# Altium PCB DataMergeBoard.PcbDoc (part 1 of 2)
Units mil, origin at the board's own origin, x right, y up, seen from the top; angles counter-clockwise.
Board outline 5250 x 1030 mil, 4 copper layers (Top Layer, Internal Plane 1, Internal Plane 2, Bottom Layer), stack 30.634 mil thick; 115 components, 100 nets, 456 pads, 199 vias.
Unrouted connection lines stored in the file: 1.
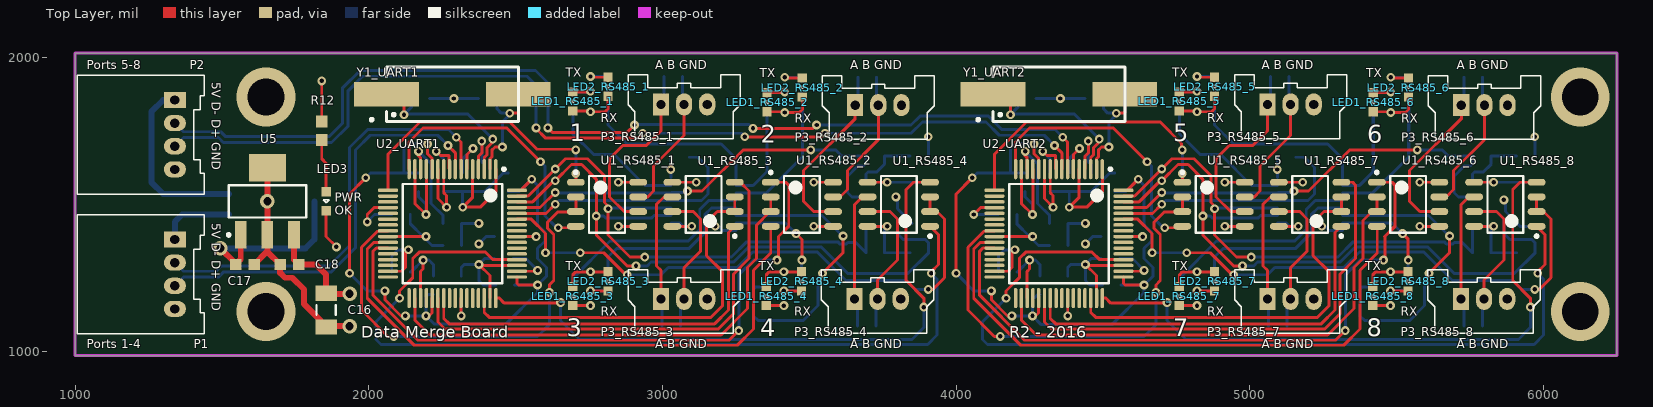
[diagram p0: Top Layer view]
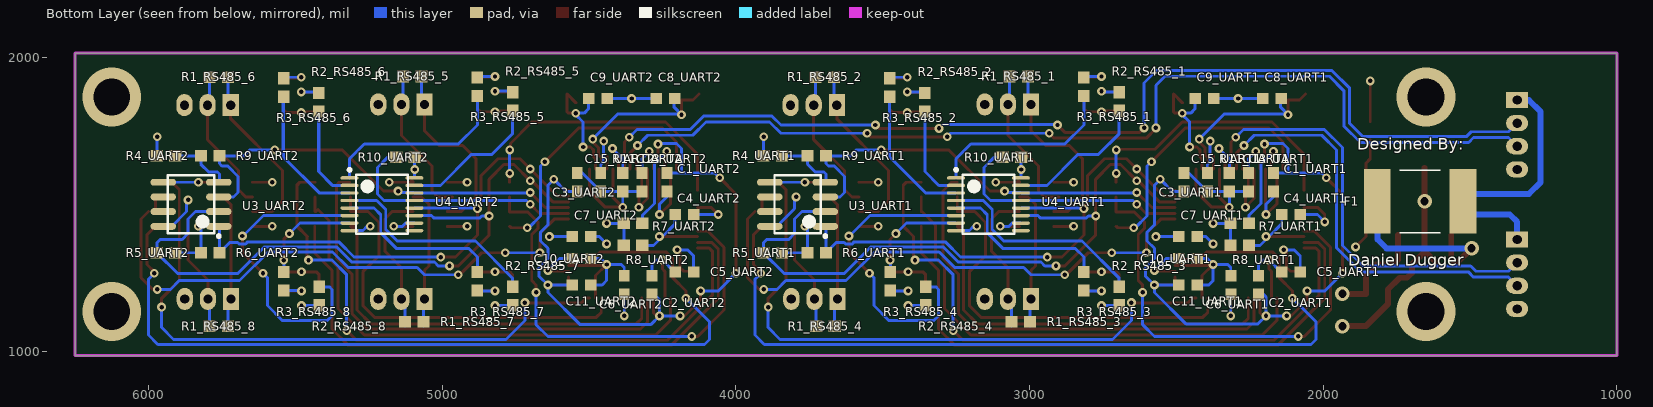
[diagram p1: Bottom Layer view, seen from below]
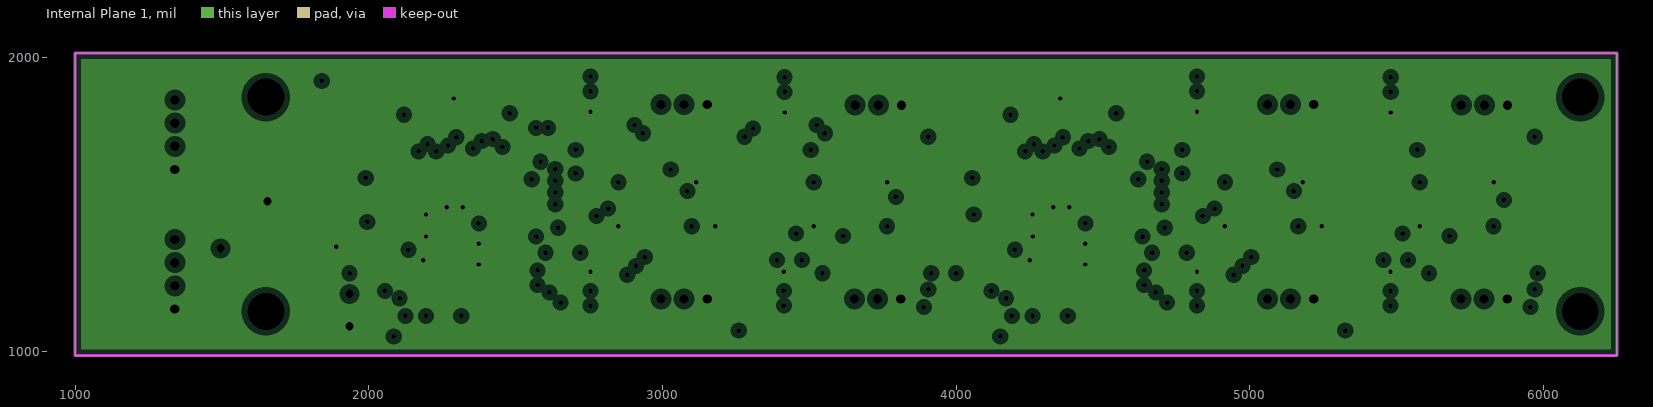
[diagram p2: Internal Plane 1, clearances drawn from the general rule]
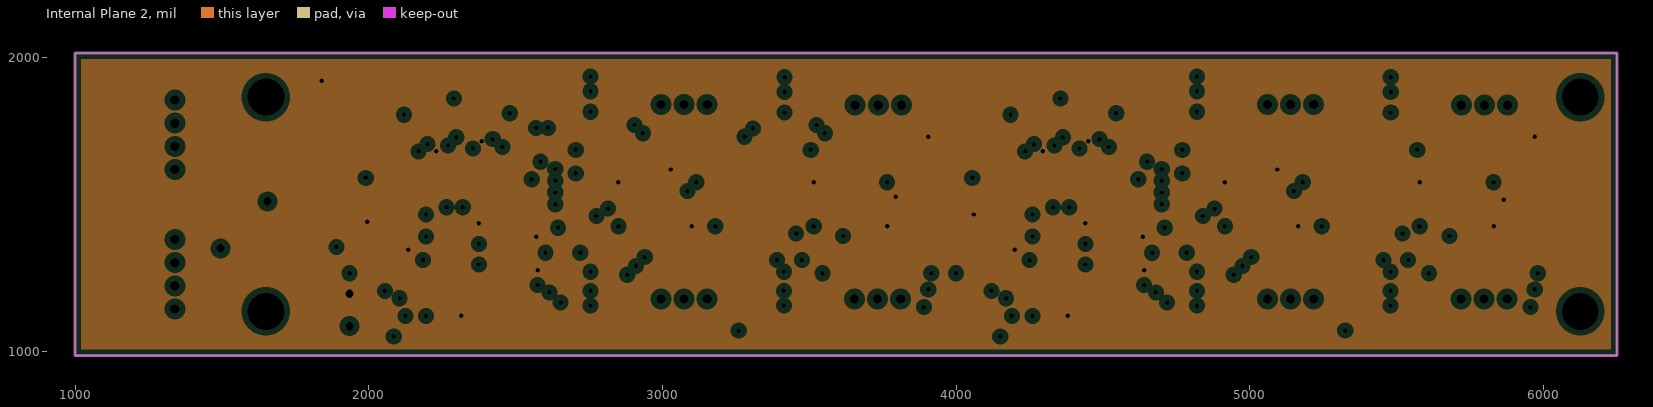
[diagram p3: Internal Plane 2, clearances drawn from the general rule]

## Layer stack, top to bottom
Top Solder: solder mask 0.4, Solder Resist, Dk 3.5
Top Layer: signal copper 1.4
Dielectric 1: core 10, FR-4, Dk 4.2
Internal Plane 1: plane copper 1.417, net GND
Dielectric 3: prepreg 5, Dk 4.2
Internal Plane 2: plane copper 1.417, net +3.3V
Dielectric 2: core 10, Dk 4.2
Bottom Layer: signal copper 1.4
Bottom Solder: solder mask 0.4, Solder Resist, Dk 3.5

## Board outline
1000,985 6250,985 6250,2015 1000,2015

## Design rules (kind name [scope] priority, off if disabled: settings)
Clearance [All] p1: gap=7
DiffPairsRouting [All] p1: maxlimit=10 minlimit=10 mostfreqgap=10 toplayer_minwidth=10 toplayer_maxwidth=20 toplayer_prefwidth=10 bottomlayer_minwidth=10 bottomlayer_maxwidth=20 bottomlayer_prefwidth=10 maxuncoupledlength=500
MatchedLengths [InDifferentialPairClass('All Differential Pairs')] p1: tolerance=150 checknetsindiffpair=TRUE checkdiffpairvsdiffpair=FALSE checkxsignals=FALSE checkothers=FALSE
MinimumSolderMaskSliver [All] p1 off: minsoldermaskwidth=10
PlaneClearance [All] p1: clearance=20
PlaneConnect [All] p1: planeconnectstyle=Relief reliefexpansion=20 reliefentries=4 reliefconductorwidth=10 reliefairgap=10
PolygonConnect [All] p1: connectstyle=Relief reliefconductorwidth=10 reliefentries=4 polygonreliefangle="90 Angle" airgapwidth=10
RoomDefinition VREG [InComponentClass('VREG')] p1: confinementstyle=ConfineIn formatcopy=TRUE lockcomponents=FALSE outline 1465.16,1020 2015,1020 2015,1980 1465.16,1980
RoomDefinition UART2 [InComponentClass('UART2')] p2: confinementstyle=ConfineIn formatcopy=TRUE lockcomponents=FALSE outline 3970,1020 6030,1020 6030,1980 3970,1980
RoomDefinition UART1 [InComponentClass('UART1')] p3: confinementstyle=ConfineIn formatcopy=TRUE lockcomponents=FALSE outline 1905,1020 3965,1020 3965,1980 1905,1980
RoomDefinition RS485_8 [InComponentClass('RS485_8')] p4: confinementstyle=ConfineIn formatcopy=TRUE lockcomponents=FALSE outline 5368.7,1022.48 6028.7,1022.48 6028.7,1632.48 5368.7,1632.48
RoomDefinition RS485_7 [InComponentClass('RS485_7')] p5: confinementstyle=ConfineIn formatcopy=TRUE lockcomponents=FALSE outline 4710,1022.48 5370,1022.48 5370,1632.48 4710,1632.48
RoomDefinition RS485_6 [InComponentClass('RS485_6')] p6: confinementstyle=ConfineIn formatcopy=TRUE lockcomponents=FALSE outline 5369.88,1367.52 6029.88,1367.52 6029.88,1977.52 5369.88,1977.52
RoomDefinition RS485_5 [InComponentClass('RS485_5')] p7: confinementstyle=ConfineIn formatcopy=TRUE lockcomponents=FALSE outline 4710,1370 5370,1370 5370,1980 4710,1980
RoomDefinition RS485_4 [InComponentClass('RS485_4')] p8: confinementstyle=ConfineIn formatcopy=TRUE lockcomponents=FALSE outline 3303.7,1022.48 3963.7,1022.48 3963.7,1632.48 3303.7,1632.48
RoomDefinition RS485_3 [InComponentClass('RS485_3')] p9: confinementstyle=ConfineIn formatcopy=TRUE lockcomponents=FALSE outline 2645,1022.48 3305,1022.48 3305,1632.48 2645,1632.48
RoomDefinition RS485_2 [InComponentClass('RS485_2')] p10: confinementstyle=ConfineIn formatcopy=TRUE lockcomponents=FALSE outline 3306.18,1367.52 3966.18,1367.52 3966.18,1977.52 3306.18,1977.52
RoomDefinition RS485_1 [InComponentClass('RS485_1')] p11: confinementstyle=ConfineIn formatcopy=TRUE lockcomponents=FALSE outline 2645,1370 3305,1370 3305,1980 2645,1980
RoutingVias [All] p1: holewidth=15 width=30 viastyle="Through Hole" minholewidth=15 minwidth=30 maxholewidth=28 maxwidth=50
SilkToSolderMaskClearance [IsPad] p1 off: minsilkscreentomaskgap=10 clearancetoexposedcopper=TRUE
SolderMaskExpansion SolderMaskExpansion_1 [IsVia And (Not IsTestpoint)] p1: expansion=-250
SolderMaskExpansion [All] p2: expansion=4
Width [All] p1: maxlimit=20 minlimit=10 preferedwidth=10 minimp=50.000000 maximp=50.000000 favimp=50.000000
25 further rules are at their usual default settings.

## Classes and differential pairs
component class DataMergeBoardTop: P1 P2
component class RS485_1: LED1_RS485_1 LED2_RS485_1 P3_RS485_1 R1_RS485_1 R2_RS485_1 R3_RS485_1 TX U1_RS485_1
component class RS485_2: LED1_RS485_2 LED2_RS485_2 P3_RS485_2 R1_RS485_2 R2_RS485_2 R3_RS485_2 U1_RS485_2
component class RS485_3: LED1_RS485_3 LED2_RS485_3 P3_RS485_3 R1_RS485_3 R2_RS485_3 R3_RS485_3 U1_RS485_3
component class RS485_4: LED1_RS485_4 LED2_RS485_4 P3_RS485_4 R1_RS485_4 R2_RS485_4 R3_RS485_4 U1_RS485_4
component class RS485_5: LED1_RS485_5 LED2_RS485_5 P3_RS485_5 R1_RS485_5 R2_RS485_5 R3_RS485_5 U1_RS485_5
component class RS485_6: LED1_RS485_6 LED2_RS485_6 P3_RS485_6 R1_RS485_6 R2_RS485_6 R3_RS485_6 U1_RS485_6
component class RS485_7: LED1_RS485_7 LED2_RS485_7 P3_RS485_7 R1_RS485_7 R2_RS485_7 R3_RS485_7 U1_RS485_7
component class RS485_8: LED1_RS485_8 LED2_RS485_8 P3_RS485_8 R1_RS485_8 R2_RS485_8 R3_RS485_8 U1_RS485_8
component class UART1: C1_UART1 C2_UART1 C3_UART1 C4_UART1 C5_UART1 C6_UART1 C7_UART1 C8_UART1 C9_UART1 C10_UART1 C11_UART1 C13_UART1 C15_UART1 R4_UART1 R5_UART1 R6_UART1 R7_UART1 R8_UART1 R9_UART1 R10_UART1 R11_UART1 U2_UART1 U3_UART1 U4_UART1 Y1_UART1
component class UART2: C1_UART2 C2_UART2 C3_UART2 C4_UART2 C5_UART2 C6_UART2 C7_UART2 C8_UART2 C9_UART2 C10_UART2 C11_UART2 C13_UART2 C15_UART2 R4_UART2 R5_UART2 R6_UART2 R7_UART2 R8_UART2 R9_UART2 R10_UART2 R11_UART2 U2_UART2 U3_UART2 U4_UART2 Y1_UART2
component class VREG: C16 C17 C18 F1 LED3 R12 U5
channel class UARTtoRS485: RS485_1 RS485_2 RS485_3 RS485_4 RS485_5 RS485_6 RS485_7 RS485_8
channel class USBtoUART: UART1 UART2
differential pair USB_2: +USB_2_P -USB_2_N
differential pair USB_1: +USB_1_P -USB_1_N

## Components (designator, comment, footprint, x,y, rotation, side; value= is the part's Value field where it differs from the comment)
C1_UART1 "Cap" CAPC0603 2170,1575 r90 bottom (schematic designator C1)
C1_UART2 "Cap" CAPC0603 4235,1575 r90 bottom (schematic designator C1)
C2_UART1 "Cap" CAPC0603 2220,1225 r270 bottom (schematic designator C2)
C2_UART2 "Cap" CAPC0603 4285,1225 r270 bottom (schematic designator C2)
C3_UART1 "Cap" CAPC0603 2475,1575 r270 bottom (schematic designator C3)
C3_UART2 "Cap" CAPC0603 4540,1575 r270 bottom (schematic designator C3)
C4_UART1 "Cap" CAPC0603 2110,1465 r180 bottom (schematic designator C4)
C4_UART2 "Cap" CAPC0603 4175,1465 r180 bottom (schematic designator C4)
C5_UART1 "Cap" CAPC0603 2110,1270 r180 bottom (schematic designator C5)
C5_UART2 "Cap" CAPC0603 4175,1270 r180 bottom (schematic designator C5)
C6_UART1 "Cap" CAPC0603 2315,1225 r270 bottom (schematic designator C6)
C6_UART2 "Cap" CAPC0603 4380,1225 r270 bottom (schematic designator C6)
C7_UART1 "Cap" CAPC0603 2460,1390 r0 bottom (schematic designator C7)
C7_UART2 "Cap" CAPC0603 4525,1390 r0 bottom (schematic designator C7)
C8_UART1 "Cap" CAPC0603 2175,1860 r0 bottom (schematic designator C8)
C8_UART2 "Cap" CAPC0603 4240,1860 r0 bottom (schematic designator C8)
C9_UART1 "Cap" CAPC0603 2405,1860 r180 bottom (schematic designator C9)
C9_UART2 "Cap" CAPC0603 4470,1860 r180 bottom (schematic designator C9)
C10_UART1 "Cap" CAPC0603 2460,1315 r0 bottom (schematic designator C10)
C10_UART2 "Cap" CAPC0603 4525,1315 r0 bottom (schematic designator C10)
C11_UART1 "Cap" CAPC0603 2460,1225 r180 bottom (schematic designator C11)
C11_UART2 "Cap" CAPC0603 4525,1225 r180 bottom (schematic designator C11)
C13_UART1 "Cap" CAPC0603 2255,1575 r90 bottom (schematic designator C13)
C13_UART2 "Cap" CAPC0603 4320,1575 r90 bottom (schematic designator C13)
C15_UART1 "Cap" CAPC0603 2395,1575 r270 bottom (schematic designator C15)
C15_UART2 "Cap" CAPC0603 4460,1575 r270 bottom (schematic designator C15)
C16 "Cap" CAPC1206 1855,1140 r90 top
C17 "Cap" CAPC0603 1578.5,1295 r0 top
C18 "Cap" CAPC0603 1730,1295 r180 top
F1 "PTC Fuse" PTC7451X11N 1670,1510 r0 bottom
LED1_RS485_1 "LED" LED0603 2695,1850 r270 top (schematic designator LED1)
LED1_RS485_2 "LED" LED0603 3356.18,1847.52 r270 top (schematic designator LED1)
LED1_RS485_3 "LED" LED0603 2695,1187.48 r90 top (schematic designator LED1)
LED1_RS485_4 "LED" LED0603 3353.7,1187.48 r90 top (schematic designator LED1)
LED1_RS485_5 "LED" LED0603 4760,1850 r270 top (schematic designator LED1)
LED1_RS485_6 "LED" LED0603 5419.88,1847.52 r270 top (schematic designator LED1)
LED1_RS485_7 "LED" LED0603 4760,1187.48 r90 top (schematic designator LED1)
LED1_RS485_8 "LED" LED0603 5418.7,1187.48 r90 top (schematic designator LED1)
LED2_RS485_1 "LED" LED0603 2815,1900 r270 top (schematic designator LED2)
LED2_RS485_2 "LED" LED0603 3476.18,1897.52 r270 top (schematic designator LED2)
LED2_RS485_3 "LED" LED0603 2815,1237.48 r90 top (schematic designator LED2)
LED2_RS485_4 "LED" LED0603 3473.7,1237.48 r90 top (schematic designator LED2)
LED2_RS485_5 "LED" LED0603 4880,1900 r270 top (schematic designator LED2)
LED2_RS485_6 "LED" LED0603 5539.88,1897.52 r270 top (schematic designator LED2)
LED2_RS485_7 "LED" LED0603 4880,1237.48 r90 top (schematic designator LED2)
LED2_RS485_8 "LED" LED0603 5538.7,1237.48 r90 top (schematic designator LED2)
LED3 "LED" LED0603 1855,1510 r270 top
P1 "1X4 RA" MOLEX-HDR-1X4-SHERLOCK-RA 1340,1380 r90 top locked
P2 "1X4 RA" MOLEX-HDR-1X4-SHERLOCK-RA 1340,1855 r90 top locked
P3_RS485_1 "1X3 VERT" MOLEX-HDR-1X3-SHERLOCK-VERT 2995,1840 r180 top (schematic designator P3)
P3_RS485_2 "1X3 VERT" MOLEX-HDR-1X3-SHERLOCK-VERT 3656.18,1837.52 r180 top (schematic designator P3)
P3_RS485_3 "1X3 VERT" MOLEX-HDR-1X3-SHERLOCK-VERT 2995,1177.48 r180 top (schematic designator P3)
P3_RS485_4 "1X3 VERT" MOLEX-HDR-1X3-SHERLOCK-VERT 3653.7,1177.48 r180 top (schematic designator P3)
P3_RS485_5 "1X3 VERT" MOLEX-HDR-1X3-SHERLOCK-VERT 5060,1840 r180 top (schematic designator P3)
P3_RS485_6 "1X3 VERT" MOLEX-HDR-1X3-SHERLOCK-VERT 5719.88,1837.52 r180 top (schematic designator P3)
P3_RS485_7 "1X3 VERT" MOLEX-HDR-1X3-SHERLOCK-VERT 5060,1177.48 r180 top (schematic designator P3)
P3_RS485_8 "1X3 VERT" MOLEX-HDR-1X3-SHERLOCK-VERT 5718.7,1177.48 r180 top (schematic designator P3)
R1_RS485_1 "Res" RES0603 3036.3,1935 r180 bottom (schematic designator R1)
R1_RS485_2 "Res" RES0603 3697.48,1932.52 r180 bottom (schematic designator R1)
R1_RS485_3 "Res" RES0603 3030,1100 r180 bottom (schematic designator R1)
R1_RS485_4 "Res" RES0603 3695,1085 r180 bottom (schematic designator R1)
R1_RS485_5 "Res" RES0603 5101.3,1935 r180 bottom (schematic designator R1)
R1_RS485_6 "Res" RES0603 5761.18,1932.52 r180 bottom (schematic designator R1)
R1_RS485_7 "Res" RES0603 5095,1100 r180 bottom (schematic designator R1)
R1_RS485_8 "Res" RES0603 5760,1085 r180 bottom (schematic designator R1)
R2_RS485_1 "Res" RES0603 2695,1850 r90 bottom (schematic designator R2)
R2_RS485_2 "Res" RES0603 3356.18,1847.52 r90 bottom (schematic designator R2)
R2_RS485_3 "Res" RES0603 2695,1187.48 r270 bottom (schematic designator R2)
R2_RS485_4 "Res" RES0603 3353.7,1187.48 r270 bottom (schematic designator R2)
R2_RS485_5 "Res" RES0603 4760,1850 r90 bottom (schematic designator R2)
R2_RS485_6 "Res" RES0603 5419.88,1847.52 r90 bottom (schematic designator R2)
R2_RS485_7 "Res" RES0603 4760,1187.48 r270 bottom (schematic designator R2)
R2_RS485_8 "Res" RES0603 5418.7,1187.48 r270 bottom (schematic designator R2)
R3_RS485_1 "Res" RES0603 2815,1900 r90 bottom (schematic designator R3)
R3_RS485_2 "Res" RES0603 3476.18,1897.52 r90 bottom (schematic designator R3)
R3_RS485_3 "Res" RES0603 2815,1237.48 r270 bottom (schematic designator R3)
R3_RS485_4 "Res" RES0603 3473.7,1237.48 r270 bottom (schematic designator R3)
R3_RS485_5 "Res" RES0603 4880,1900 r90 bottom (schematic designator R3)
R3_RS485_6 "Res" RES0603 5539.88,1897.52 r90 bottom (schematic designator R3)
R3_RS485_7 "Res" RES0603 4880,1237.48 r270 bottom (schematic designator R3)
R3_RS485_8 "Res" RES0603 5538.7,1237.48 r270 bottom (schematic designator R3)
R4_UART1 "Res" RES0603 3875,1665 r180 bottom (schematic designator R4)
R4_UART2 "Res" RES0603 5940,1665 r180 bottom (schematic designator R4)
R5_UART1 "Res" RES0603 3875,1335 r0 bottom (schematic designator R5)
R5_UART2 "Res" RES0603 5940,1335 r0 bottom (schematic designator R5)
R6_UART1 "Res" RES0603 3725,1335 r180 bottom (schematic designator R6)
R6_UART2 "Res" RES0603 5790,1335 r180 bottom (schematic designator R6)
R7_UART1 "Res" RES0603 2285,1435 r180 bottom (schematic designator R7)
R7_UART2 "Res" RES0603 4350,1435 r180 bottom (schematic designator R7)
R8_UART1 "Res" RES0603 2285,1360 r180 bottom (schematic designator R8)
R8_UART2 "Res" RES0603 4350,1360 r180 bottom (schematic designator R8)
R9_UART1 "Res" RES0603 3725,1665 r180 bottom (schematic designator R9)
R9_UART2 "Res" RES0603 5790,1665 r180 bottom (schematic designator R9)
R10_UART1 "Res" RES0603 3060,1660 r0 bottom (schematic designator R10)
R10_UART2 "Res" RES0603 5125,1660 r0 bottom (schematic designator R10)
R11_UART1 "Res" RES0603 2320,1575 r270 bottom (schematic designator R11)
R11_UART2 "Res" RES0603 4385,1575 r270 bottom (schematic designator R11)
R12 "Res" RES0603 1840,1750 r270 top
U1_RS485_1 "MAX14840EASA+" MAX14840EASA+ 2811.3,1500 r0 top (schematic designator U1)
U1_RS485_2 "MAX14840EASA+" MAX14840EASA+ 3475,1500 r0 top (schematic designator U1)
U1_RS485_3 "MAX14840EASA+" MAX14840EASA+ 3140,1500 r180 top (schematic designator U1)
U1_RS485_4 "MAX14840EASA+" MAX14840EASA+ 3805,1500 r180 top (schematic designator U1)
U1_RS485_5 "MAX14840EASA+" MAX14840EASA+ 4876.3,1500 r0 top (schematic designator U1)
U1_RS485_6 "MAX14840EASA+" MAX14840EASA+ 5538.7,1500 r0 top (schematic designator U1)
U1_RS485_7 "MAX14840EASA+" MAX14840EASA+ 5205,1500 r180 top (schematic designator U1)
U1_RS485_8 "MAX14840EASA+" MAX14840EASA+ 5870,1500 r180 top (schematic designator U1)
U2_UART1 "FT4232H" FT4232HL 2285,1400 r270 top (schematic designator U2)
U2_UART2 "FT4232H" FT4232HL 4350,1400 r270 top (schematic designator U2)
U3_UART1 "93LC46B" SOIC-8pin 3790,1500 r0 bottom (schematic designator U3)
U3_UART2 "93LC46B" SOIC-8pin 5855,1500 r0 bottom (schematic designator U3)
U4_UART1 "SN74HC595" TSSOP-16pin 3140,1500 r180 bottom (schematic designator U4)
U4_UART2 "SN74HC595" TSSOP-16pin 5205,1500 r180 bottom (schematic designator U4)
U5 "3.3V LDO Reg" SOT23-4n 1655,1510 r90 top
Y1_UART1 "12MHz" HC49/US 2285,1875 r0 top (schematic designator Y1)
Y1_UART2 "12MHz" HC49/US 4350,1875 r0 top (schematic designator Y1)

## Footprints (in the part's own frame and the unit in brackets; to place one, negate y for a bottom-side part, rotate by r counter-clockwise, add the part's x,y. Pads: shape width x height; smd on the part's side, far side on the other; paste and mask are expansions set on the pad)
CAPC0603 [mm] "Chip Capacitor, 2-Leads, Body 1.60x0.80mm, IPC Medium Density"
  rect 1x0.95 smd: 1(-0.8,0) 2(0.8,0)
  body extent -0.88,-0.48 0.87,0.48, height 0.8
CAPC1206 [mm] "Chip Capacitor, 2-Leads, Body 3.20x1.60mm, IPC Medium Density"
  rect 1.3x1.85 smd: 1(-1.45,0) 2(1.45,0)
  silkscreen extent -0.4,-0.82 0.4,0.82, body extent -1.7,-0.9 1.7,0.9, height 1.8
FT4232HL [mm] "TSQFP, 64-Leads, Body 10.00x10.00mm, Pitch 0.50mm, IPC Medium Density"
  oval 1.75x0.3 smd: 1(-5.575,3.75) 2(-5.575,3.25) 3(-5.575,2.75) 4(-5.575,2.25) 5(-5.575,1.75) 6(-5.575,1.25) 7(-5.575,0.75) 8(-5.575,0.25) 9(-5.575,-0.25) 10(-5.575,-0.75) 11(-5.575,-1.25) 12(-5.575,-1.75) 13(-5.575,-2.25) 14(-5.575,-2.75) 15(-5.575,-3.25) 16(-5.575,-3.75) 33(5.575,-3.75) 34(5.575,-3.25) 35(5.575,-2.75) 36(5.575,-2.25) 37(5.575,-1.75) 38(5.575,-1.25) 39(5.575,-0.75) 40(5.575,-0.25) 41(5.575,0.25) 42(5.575,0.75) 43(5.575,1.25) 44(5.575,1.75) 45(5.575,2.25) 46(5.575,2.75) 47(5.575,3.25) 48(5.575,3.75)
  oval 0.3x1.75 smd: 17(-3.75,-5.575) 18(-3.25,-5.575) 19(-2.75,-5.575) 20(-2.25,-5.575) 21(-1.75,-5.575) 22(-1.25,-5.575) 23(-0.75,-5.575) 24(-0.25,-5.575) 25(0.25,-5.575) 26(0.75,-5.575) 27(1.25,-5.575) 28(1.75,-5.575) 29(2.25,-5.575) 30(2.75,-5.575) 31(3.25,-5.575) 32(3.75,-5.575) 49(3.75,5.575) 50(3.25,5.575) 51(2.75,5.575) 52(2.25,5.575) 53(1.75,5.575) 54(1.25,5.575) 55(0.75,5.575) 56(0.25,5.575) 57(-0.25,5.575) 58(-0.75,5.575) 59(-1.25,5.575) 60(-1.75,5.575) 61(-2.25,5.575) 62(-2.75,5.575) 63(-3.25,5.575) 64(-3.75,5.575)
  silkscreen extent -5.7,-4.3 4.3,4.58, body extent -5,-5 5,5, height 1.6
HC49/US [mm]
  rect 5.6x2.1 smd: 1(-5.7,0) 2(5.7,0)
  silkscreen extent -7.11,-2.35 5.7,2.35, body extent -6.35,-2.35 6.35,2.35, height 3.16
LED0603 [mm] "Chip LED, 2-Leads, Body 1.60x0.80mm, IPC Medium Density"
  rect 0.8x0.8 smd: A(-0.825,0) C(0.825,0)
  silkscreen extent -0.13,-0.25 0.13,0.25, body extent -0.88,-0.48 0.87,0.47, height 0.8
MAX14840EASA+ [mm] "SOIC, 8-Leads, Body 4.90x3.90mm, Pitch 1.27mm, IPC Medium Density"
  oval 1.55x0.6 smd: 1(-2.7,1.905) 2(-2.7,0.635) 3(-2.7,-0.635) 4(-2.7,-1.905) 5(2.7,-1.905) 6(2.7,-0.635) 7(2.7,0.635) 8(2.7,1.905)
  silkscreen extent -2.82,-2.45 1.55,2.88, body extent -1.95,-2.45 1.95,2.45, height 1.75
MOLEX-HDR-1X3-SHERLOCK-VERT [mm]
  rect 1.397x1.905 hole 0.8: 1(0,0)
  oval 1.397x1.905 hole 0.8: 2(-2,0) 3(-4,0)
  silkscreen extent -6.85,-2.55 2.85,2.95, body extent -6.88,-2.57 2.82,2.98, height 8.57
MOLEX-HDR-1X4-SHERLOCK-RA [mm]
  rect 1.397x1.905 hole 0.8: 1(0,0)
  oval 1.397x1.905 hole 0.8: 2(-2,0) 3(-4,0) 4(-6,0)
  silkscreen extent -8.15,-2.55 2.15,8.46, body extent -8.17,-1.98 2.13,8.52, height 5.54
PTC7451X11N [mm] "Chip PTC, 2920, 7351 metric 2-Leads, Body 7.36x5.12mm, IPC Medium Density"
  rect 2.3x5.6 smd: 1(-3.7,0) 2(3.7,0)
  silkscreen extent -1.75,-2.7 1.75,2.7, body extent -3.99,-2.72 3.99,2.72, height 1.15
RES0603 [mm] "Chip Resistor, 2-Leads, Body 1.60x0.80mm, IPC Medium Density"
  rect 1.05x1 smd: 1(-0.8,0) 2(0.8,0)
  body extent -0.88,-0.48 0.87,0.47, height 0.8
SOIC-8pin [mm] "For 296-1345-1-ND"
  oval 2.2x0.6 smd: 1(-2.4,1.905) 2(-2.4,0.635) 3(-2.4,-0.635) 4(-2.4,-1.905) 5(2.4,-1.905) 6(2.4,-0.635) 7(2.4,0.635) 8(2.4,1.905)
  silkscreen extent -2.52,-2.5 2,2.88, body extent -2,-2.5 2,2.5, height 1.75
SOT23-4n [mm] "SOT223, 4-Leads, Body 6.50x7.00mm (avg), Pitch 2.30mm, IPC Medium Density"
  rect 2.4x1 smd: 1(-2.9,2.3) 2(-2.9,0) 3(-2.9,-2.3)
  rect 2.4x3.2 smd: 4(2.9,0)
  silkscreen extent -3.02,-3.35 1.4,3.47, body extent -1.85,-3.35 1.85,3.35, height 1.7
TSSOP-16pin [mm] "For 296-19764-ND"
  oval 1.55x0.3 smd: 1(-2.8,2.275) 2(-2.8,1.625) 3(-2.8,0.975) 4(-2.8,0.325) 5(-2.8,-0.325) 6(-2.8,-0.975) 7(-2.8,-1.625) 8(-2.8,-2.275) 9(2.8,-2.275) 10(2.8,-1.625) 11(2.8,-0.975) 12(2.8,-0.325) 13(2.8,0.325) 14(2.8,0.975) 15(2.8,1.625) 16(2.8,2.275)
  silkscreen extent -2.93,-2.55 2.25,3.1, body extent -2.25,-2.55 2.25,2.55, height 1.2

## Part data
C1_UART1 C1_UART2 C2_UART1 C2_UART2 C3_UART1 C3_UART2 C4_UART1 C4_UART2 C5_UART1 C5_UART2 C6_UART1 C6_UART2 C7_UART1 C7_UART2 C10_UART1 C10_UART2 C13_UART1 C13_UART2 C15_UART1 C15_UART2 C17 C18: "CAP CER 0.1UF 50V X7R 0603"
C8_UART1 C8_UART2 C9_UART1 C9_UART2: "CAP CER 27PF 50V NP0 0603"
C11_UART1 C11_UART2: "CAP CER 3.3UF 16V X5R 0603"
C16: "CAP CER 47UF 10V X5R 1206"
F1: library part PTC_Fuse, "PTC RESTTBLE 33V 1.10A CHIP 2920"
LED1_RS485_1 LED1_RS485_2 LED1_RS485_3 LED1_RS485_4 LED1_RS485_5 LED1_RS485_6 LED1_RS485_7 LED1_RS485_8: "LED RED CLEAR 0603 SMD"
LED2_RS485_1 LED2_RS485_2 LED2_RS485_3 LED2_RS485_4 LED2_RS485_5 LED2_RS485_6 LED2_RS485_7 LED2_RS485_8: "LED GREEN CLEAR 0603 SMD"
LED3: "LED ORANGE CLEAR 0603 SMD"
P1 P2: library part MOLEX-HDR-1x4-SHERLOCK_RA, "CONN HEADER 4POS 2MM R/A TIN"
P3_RS485_1 P3_RS485_2 P3_RS485_3 P3_RS485_4 P3_RS485_5 P3_RS485_6 P3_RS485_7 P3_RS485_8: library part MOLEX-HDR-1x3-SHERLOCK_VERT, "CONN HEADER 3POS 2MM VERT TIN"
R1_RS485_1 R1_RS485_2 R1_RS485_3 R1_RS485_4 R1_RS485_5 R1_RS485_6 R1_RS485_7 R1_RS485_8: "RES SMD 120 OHM 1% 1/10W 0603"
R2_RS485_1 R2_RS485_2 R2_RS485_3 R2_RS485_4 R2_RS485_5 R2_RS485_6 R2_RS485_7 R2_RS485_8 R3_RS485_1 R3_RS485_2 R3_RS485_3 R3_RS485_4 R3_RS485_5 R3_RS485_6 R3_RS485_7 R3_RS485_8: "RES SMD 330 OHM 1% 1/10W 0603"
R4_UART1 R4_UART2 R5_UART1 R5_UART2 R6_UART1 R6_UART2 R10_UART1 R10_UART2: "RES SMD 10K OHM 1% 1/10W 0603"
R7_UART1 R7_UART2: "RES SMD 1K OHM 1% 1/10W 0603"
R8_UART1 R8_UART2: "RES SMD 100K OHM 1% 1/10W 0603"
R9_UART1 R9_UART2: "RES SMD 2.2K OHM 1% 1/10W 0603"
R11_UART1 R11_UART2: "RES SMD 12K OHM 1% 1/10W 0603"
R12: "RES SMD 470 OHM 1% 1/10W 0603"
U1_RS485_1 U1_RS485_2 U1_RS485_3 U1_RS485_4 U1_RS485_5 U1_RS485_6 U1_RS485_7 U1_RS485_8: "IC TXRX RS422/485 40MBPS 8SOIC"
U2_UART1 U2_UART2: "IC USB HS QUAD UART/SYNC 64-LQFP"
U3_UART1 U3_UART2: "IC EEPROM 1KBIT 2MHZ 8SOIC"
U4_UART1 U4_UART2: "IC 8BIT SHIFT REGISTER 16-TSSOP"
U5: library part LM3940IMPX-3.3, "IC REG LDO 3.3V 1A SOT223"
Y1_UART1 Y1_UART2: library part ABLS2-12.000MHZ-D4Y-T, "CRYSTAL 12.0000MHZ 18PF SMD"

## Via types
v1: diameter 30, hole 15, Top Layer to Bottom Layer, 191 vias
v2: diameter 50, hole 28, Top Layer to Bottom Layer, 4 vias
v3: diameter 200, hole 125, Top Layer to Bottom Layer, 4 vias

## Nets (pads, with @x,y where several pads share a name; then routed paths per layer and width w, separated by ;. In a path a pad name is that pad's centre, name@x,y a point inside that pad or via, vN(x,y) a via of type N, cw(c..) or ccw(c..) an arc to the next point about the centre after c; other vN are vias at no path point)
+1.8V: C1_UART1.2 C1_UART2.2 C2_UART1.2 C2_UART2.2 C3_UART1.2 C3_UART2.2 C11_UART1.1 C11_UART2.1 U2_UART1.12 U2_UART1.37 U2_UART1.49 U2_UART1.64 U2_UART2.12 U2_UART2.37 U2_UART2.49 U2_UART2.64 | length 5026.9
  Top Layer w10: v1(1935,1265) 1935,1535 v1(1990,1590) ; v1(2055,1205) 2055,1175 2110,1120 v1(2125,1120) ; v1(2195,1120) 2205,1120 2215,1130 2215,1179.41 U2_UART1.37@2216.1,1180.51 ; v1(2200,1705) 2200,1671.82 2216.1,1655.71 U2_UART1.12@2216.1,1619.49 ; U2_UART1.49@2504.49,1252.36 2504.49,1230.51 2510,1225 v1(2575,1225) ; U2_UART1.64@2504.49,1547.64 2517.64,1547.64 v1(2555,1585) ; v1(4000,1265) 4000,1535 v1(4055,1590) ; v1(4120,1205) 4120,1175 4175,1120 v1(4190,1120) ; v1(4260,1120) 4270,1120 4280,1130 4280,1179.41 U2_UART2.37@4281.1,1180.51 ; v1(4265,1705) 4265,1671.82 4281.1,1655.71 U2_UART2.12@4281.1,1619.49 ; U2_UART2.49@4569.49,1252.36 4569.49,1230.51 4575,1225 v1(4640,1225) ; U2_UART2.64@4569.49,1547.64 4582.64,1547.64 v1(4620,1585)
  Bottom Layer w10: v1(1935,1265) 1995,1205 v1(2055,1205) ; v1(1990,1590) 2006.5,1606.5 C1_UART1.2@2170,1606.5 ; 2120,1606.5 2120,1690 2137,1707 2198,1707 v1(2200,1705) ; v1(2125,1120) v1(2195,1120) ; C2_UART1.2@2220,1193.5 2203.5,1193.5 2195,1185 v1(2195,1120) ; C3_UART1.2@2475,1543.5 2513.5,1543.5 v1(2555,1585) 2575,1565 2575,1430 2600,1405 2600,1375 2575,1350 2575,1315 2605,1285 2605,1255 v1(2575,1225) ; C11_UART1.1@2496.5,1225 v1(2575,1225) ; v1(4000,1265) 4060,1205 v1(4120,1205) ; v1(4055,1590) 4071.5,1606.5 C1_UART2.2@4235,1606.5 ; 4185,1606.5 4185,1690 4202,1707 4263,1707 v1(4265,1705) ; v1(4190,1120) v1(4260,1120) ; C2_UART2.2@4285,1193.5 4278.5,1193.5 4260,1175 v1(4260,1120) ; C3_UART2.2@4540,1543.5 4578.5,1543.5 v1(4620,1585) 4640,1565 4640,1430 4665,1405 4665,1375 4640,1350 4640,1315 4670,1285 4670,1255 v1(4640,1225) ; C11_UART2.1@4561.5,1225 v1(4640,1225) ; v1(2195,1120) 2222,1093 2468,1093 2575,1200 v1(2575,1225) ; v1(4260,1120) 4290,1090 4530,1090 4640,1200 v1(4640,1225)
+3.3V: C4_UART1.2 C4_UART2.2 C5_UART1.2 C5_UART2.2 C6_UART1.2 C6_UART2.2 C7_UART1.2 C7_UART2.2 C10_UART1.2 C10_UART2.2 C13_UART1.2 C13_UART2.2 C15_UART1.1 C15_UART2.1 C16.2 C18.1 R4_UART1.1 R4_UART2.1 R5_UART1.1 R5_UART2.1 R6_UART1.1 R6_UART2.1 R7_UART1.1 R7_UART2.1 R8_UART1.1 R8_UART2.1 R10_UART1.1 R10_UART2.1 R12.1 U1_RS485_1.8 U1_RS485_2.8 U1_RS485_3.8 U1_RS485_4.8 U1_RS485_5.8 U1_RS485_6.8 U1_RS485_7.8 U1_RS485_8.8 U2_UART1.4 U2_UART1.9 U2_UART1.20 U2_UART1.31 U2_UART1.42 U2_UART1.50 U2_UART1.56 U2_UART2.4 U2_UART2.9 U2_UART2.20 U2_UART2.31 U2_UART2.42 U2_UART2.50 U2_UART2.56 U3_UART1.8 U3_UART2.8 U4_UART1.10 U4_UART1.16 U4_UART2.10 U4_UART2.16 U5.3 | length 4879.3
  Top Layer w10: R12.1@1840,1781.5 v1(1840,1920) ; v1(1995,1440) 1995,1465 2018.58,1488.58 U2_UART1.20@2065.51,1488.58 ; U2_UART1.31@2065.51,1272.05 2112.05,1272.05 2125,1285 2125,1335 v1(2135,1345) ; v1(2230,1680) 2244.06,1665.94 2272.68,1665.94 2273.38,1665.23 2273.38,1621.27 U2_UART1.9@2275.16,1619.49 ; v1(2315,1120) 2314.53,1120.47 U2_UART1.42@2314.53,1180.51 U2_UART1.42@2315,1180.04 ; U2_UART1.4@2373.58,1619.49 2373.58,1663.58 2385,1675 v1(2385,1715) ; U2_UART1.50@2504.49,1272.05 2572.05,1272.05 v1(2575,1275) ; U2_UART1.56@2504.49,1390.16 2569.84,1390.16 v1(2570,1390) ; v1(2850,1575) U1_RS485_1.8@2917.6,1575 ; U1_RS485_3.8@3033.7,1425 v1(3100,1425) ; v1(3515,1575) U1_RS485_2.8@3581.3,1575 ; U1_RS485_4.8@3698.7,1425 v1(3765,1425) ; v1(4060,1465) 4083.58,1488.58 U2_UART2.20@4130.51,1488.58 ; U2_UART2.31@4130.51,1272.05 4177.05,1272.05 4190,1285 4190,1335 v1(4200,1345) ; v1(4295,1680) 4309.06,1665.94 4337.68,1665.94 4338.38,1665.23 4338.38,1621.27 U2_UART2.9@4340.16,1619.49 ; U2_UART2.42@4379.53,1180.51 4380,1180.04 v1(4380,1120) ; U2_UART2.4@4438.58,1619.49 4438.58,1663.58 4450,1675 v1(4450,1715) ; U2_UART2.50@4569.49,1272.05 4637.05,1272.05 v1(4640,1275) ; U2_UART2.56@4569.49,1390.16 4634.84,1390.16 v1(4635,1390) ; v1(4915,1575) U1_RS485_5.8@4982.6,1575 ; U1_RS485_7.8@5098.7,1425 v1(5165,1425) ; v1(5578.7,1575) U1_RS485_6.8@5645,1575 ; U1_RS485_8.8@5763.7,1425 v1(5830,1425)
  Top Layer w20: U5.3@1745.55,1395.83 1745.55,1310.94 C18.1@1761.5,1295 1820,1295 1855,1260 1855,1195 v2(1935,1195)
  Bottom Layer w10: v1(1995,1440) 2020,1465 C4_UART1.2@2078.5,1465 ; C5_UART1.2@2078.5,1270 2078.5,1323.5 2100,1345 v1(2135,1345) ; v1(2230,1680) 2255,1655 C13_UART1.2@2255,1606.5 ; v1(2315,1120) C6_UART1.2@2315,1193.5 ; R8_UART1.1@2316.5,1360 R7_UART1.1@2316.5,1435 v1(2375,1435) ; v1(2385,1715) 2385,1645 2395,1635 C15_UART1.1@2395,1606.5 ; C10_UART1.2@2491.5,1315 2535,1315 v1(2575,1275) ; C7_UART1.2@2491.5,1390 v1(2570,1390) ; U4_UART1.16@3028.5,1590.83 v1(3028.5,1618.5) R10_UART1.1@3028.5,1660 ; U4_UART1.10@3029.76,1436.02 3058.98,1436.02 3070,1425 v1(3100,1425) ; v1(3765,1425) 3756.5,1416.5 R6_UART1.1@3756.5,1335 R5_UART1.1@3843.5,1335 ; v1(3795,1525) 3800,1520 3800,1485 U3_UART1.8@3850,1435 ; v1(3905,1730) 3906.5,1728.5 R4_UART1.1@3906.5,1665 ; v1(4060,1465) C4_UART2.2@4143.5,1465 ; C5_UART2.2@4143.5,1270 4143.5,1323.5 4165,1345 v1(4200,1345) ; v1(4295,1680) 4320,1655 C13_UART2.2@4320,1606.5 ; v1(4380,1120) C6_UART2.2@4380,1193.5 ; R8_UART2.1@4381.5,1360 R7_UART2.1@4381.5,1435 v1(4440,1435) ; v1(4450,1715) 4450,1645 4460,1635 C15_UART2.1@4460,1606.5 ; C10_UART2.2@4556.5,1315 4600,1315 v1(4640,1275) ; C7_UART2.2@4556.5,1390 v1(4635,1390) ; U4_UART2.16@5093.5,1590.83 v1(5093.5,1618.5) R10_UART2.1@5093.5,1660 ; U4_UART2.10@5094.76,1436.02 5123.98,1436.02 5135,1425 v1(5165,1425) ; v1(5830,1425) 5821.5,1416.5 R6_UART2.1@5821.5,1335 R5_UART2.1@5908.5,1335 ; v1(5865,1515) 5870,1510 5870,1475 5920,1425 U3_UART2.8@5949.49,1425 ; v1(5970,1730) 5971.5,1728.5 R4_UART2.1@5971.5,1665
EECLK_UART1: R5_UART1.2 U2_UART1.62 U3_UART1.2 U4_UART1.11 | length 2380.3
  Top Layer w10: U2_UART1.62@2504.49,1508.27 2558.27,1508.27 2630,1580 v1(2635,1580) 2690,1635 2725,1635 2775,1585 v1(2775,1460) 2775,1395 2880,1290 v1(2910,1290)
  Bottom Layer w10: v1(2775,1460) 2800,1460 2806.07,1453.93 2963.93,1453.93 2971.61,1461.61 U4_UART1.11@3029.76,1461.61 ; v1(2910,1290) 2948.18,1290 2961.18,1303 3243,1303 3295,1355 3540,1355 3630,1265 3836.5,1265 R5_UART1.2@3906.5,1335 3906.5,1368.5 3895,1380 3820,1380 3800,1400 3800,1450 3775,1475 U3_UART1.2@3695.51,1475
EECLK_UART2: R5_UART2.2 U2_UART2.62 U3_UART2.2 U4_UART2.11 | length 2380.3
  Top Layer w10: U2_UART2.62@4569.49,1508.27 4623.27,1508.27 4695,1580 v1(4700,1580) 4755,1635 4790,1635 4840,1585 v1(4840,1460) 4840,1395 4945,1290 v1(4975,1290)
  Bottom Layer w10: v1(4840,1460) 4865,1460 4871.07,1453.93 5028.93,1453.93 5036.61,1461.61 U4_UART2.11@5094.76,1461.61 ; v1(4975,1290) 5013.18,1290 5026.18,1303 5308,1303 5360,1355 5605,1355 5695,1265 5901.5,1265 R5_UART2.2@5971.5,1335 5971.5,1368.5 5960,1380 5885,1380 5865,1400 5865,1450 5840,1475 U3_UART2.2@5760.51,1475
EECS_UART1: R6_UART1.2 U2_UART1.63 U3_UART1.1 U4_UART1.12 | length 1839.2
  Top Layer w10: U2_UART1.63@2504.49,1527.95 2542.95,1527.95 v1(2635,1620) 2670,1655 2745,1655 2803,1597 2803,1505.96 2815,1493.96 v1(2815,1485) 2815,1395 2890,1320 v1(2940,1320)
  Bottom Layer w10: v1(2815,1485) 2817.2,1487.2 U4_UART1.12@3029.76,1487.2 ; v1(2940,1320) 3235,1320 3287,1372 3596.82,1372 3603.82,1365 3626.18,1365 3631.18,1370 3658.5,1370 R6_UART1.2@3693.5,1335 3693.5,1422.99 U3_UART1.1@3695.51,1425
EECS_UART2: R6_UART2.2 U2_UART2.63 U3_UART2.1 U4_UART2.12 | length 1839.2
  Top Layer w10: U2_UART2.63@4569.49,1527.95 4607.95,1527.95 v1(4700,1620) 4735,1655 4810,1655 4868,1597 4868,1505.96 4880,1493.96 v1(4880,1485) 4880,1395 4955,1320 v1(5005,1320)
  Bottom Layer w10: v1(4880,1485) 4882.2,1487.2 U4_UART2.12@5094.76,1487.2 ; v1(5005,1320) 5300,1320 5352,1372 5661.82,1372 5668.82,1365 5691.18,1365 5696.18,1370 5723.5,1370 R6_UART2.2@5758.5,1335 5758.5,1422.99 U3_UART2.1@5760.51,1425
EEDATA_UART1: R9_UART1.2 U2_UART1.61 U3_UART1.3 U4_UART1.14 | length 1514.7
  Top Layer w10: U2_UART1.61@2504.49,1488.58 2583.58,1488.58 v1(2635,1540) ; v1(3085,1545) 3135,1545 3275,1685 v1(3505,1685)
  Bottom Layer w10: v1(2635,1540) 2636.61,1538.39 U4_UART1.14@3029.76,1538.39 3031.38,1540 3080,1540 v1(3085,1545) ; v1(3505,1685) 3590,1685 3610,1665 R9_UART1.2@3693.5,1665 3693.5,1638.5 3685,1630 3665,1630 3630,1595 3630,1540 3645,1525 U3_UART1.3@3695.51,1525
EEDATA_UART2: R9_UART2.2 U2_UART2.61 U3_UART2.3 U4_UART2.14 | length 1514.7
  Top Layer w10: U2_UART2.61@4569.49,1488.58 4648.58,1488.58 v1(4700,1540) ; v1(5150,1545) 5200,1545 5340,1685 v1(5570,1685)
  Bottom Layer w10: v1(4700,1540) 4701.61,1538.39 U4_UART2.14@5094.76,1538.39 5096.38,1540 5145,1540 v1(5150,1545) ; v1(5570,1685) 5655,1685 5675,1665 R9_UART2.2@5758.5,1665 5758.5,1638.5 5750,1630 5730,1630 5695,1595 5695,1540 5710,1525 U3_UART2.3@5760.51,1525